# Altium PCB CL-HC-V2.1.PcbDoc (part 2 of 2)
Units mil, origin at the board's own origin, x right, y up, seen from the top; angles counter-clockwise.
Board outline 12846.15 x 9153.85 mil, 2 copper layers (TopLayer, BottomLayer); 137 components, 528 nets, 526 pads, 1 vias.
Unrouted connection lines stored in the file: 32.
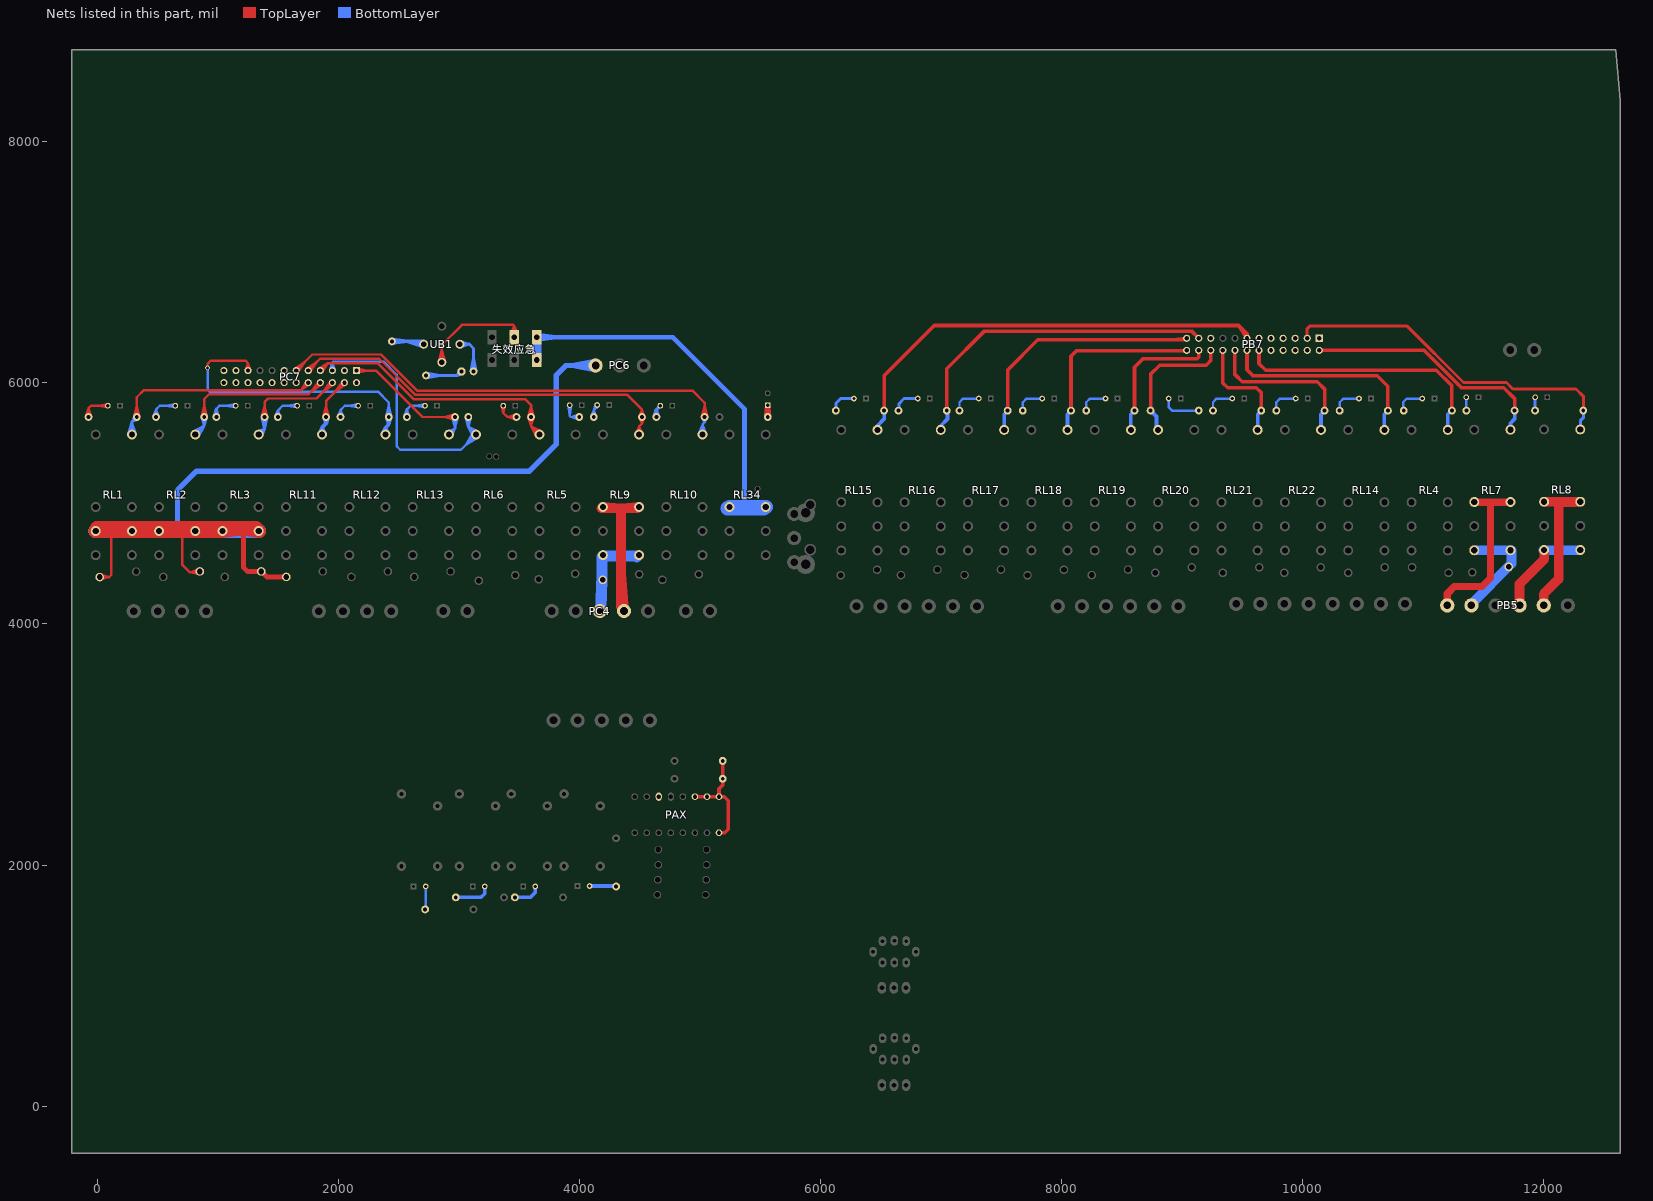
[diagram p2: the nets of this part, all layers, seen from the top]

## Via types
v1: diameter 40, hole 24, TopLayer to BottomLayer, tented both sides, 1 vias

## Nets (pads, with @x,y where several pads share a name; then routed paths per layer and width w, separated by ;. In a path a pad name is that pad's centre, name@x,y a point inside that pad or via, vN(x,y) a via of type N, cw(c..) or ccw(c..) an arc to the next point about the centre after c; other vN are vias at no path point) (continued)
L预热: PC6.1 RL1.4 RL2.4 RL3.4 RN15.1 RN18.1 RN19.1 RN20.1 | length 15496.7
  TopLayer w20: RL1.4@-10.82,4781.78 91.52,4777.46 ; RL1.4@-10.67,4770.44 91.52,4777.46 ; RL1.4@-9.27,4759.19 91.52,4777.46 ; RL1.4@-8.01,4801.67 91.52,4777.46 ; RL1.4@-3.76,4739.87 91.52,4777.46 ; RL1.4@18.6,4777.46 109.58,4777.46 117.92,4769.12 117.92,4406.11 100.71,4388.91 ; RN18.1@21.95,4388.91 100.71,4388.91 ; RN18.1@26.06,4363.81 100.71,4388.91 ; RN18.1@26.06,4414.01 100.71,4388.91 ; RL2.4@807.45,4800.81 713.62,4760.67 ; RL2.4@813.38,4739.16 713.62,4760.67 ; RL2.4@813.5,4781.65 713.62,4760.67 ; RL2.4@815.21,4770.44 713.62,4760.67 ; RL2.4@815.66,4759.11 713.62,4760.67 ; RN19.1@846.19,4459.77 771.98,4426.36 ; RL2.4@846.45,4760.67 708.47,4760.67 708.47,4489.87 771.98,4426.36 ; RN19.1@851.67,4409.82 771.98,4426.36 ; RN19.1@852.21,4426.36 771.98,4426.36 ; RN19.1@852.88,4435.23 771.98,4426.36
  TopLayer w39.37: 1215.91,4793.35 1215.91,4465.77 1246.46,4435.23 RN20.1@1362.88,4435.23 1408.55,4389.56 RN15.1@1570.52,4389.56
  TopLayer w118.11: 114.48,4793.35 RL2.4@515.21,4770.44 ; 391.97,4793.35 RL1.4@-10.67,4770.44 RL1.4@289.33,4770.44 ; 639.92,4793.35 RL3.4@1041.08,4770.44 ; 915.95,4793.35 RL2.4@515.21,4770.44 ; RL1.4@289.33,4770.44 RL2.4@515.21,4770.44 ; RL1.4@289.33,4770.44 -0.59,4793.35 RL3.4@1041.08,4793.35 ; RL1.4@289.33,4770.44 690.33,4793.35 RL2.4@515.21,4770.44 ; RL2.4@515.21,4770.44 414.17,4793.35 RL2.4@815.21,4770.44 ; RL2.4@515.21,4770.44 RL2.4@815.21,4770.44 ; RL2.4@815.21,4770.44 RL3.4@1041.08,4770.44 ; RL2.4@815.21,4770.44 RL3.4@1041.08,4793.35 ; RL3.4@1041.08,4770.44 1215.91,4793.35 ; RL3.4@1041.08,4793.35 1215.91,4793.35 ; 1215.91,4793.35 RL3.4@1341.08,4770.44 1318.18,4793.35 1215.91,4793.35
  BottomLayer w45: 667.72,4786.46 667.72,5109.29 825.2,5266.77 3586.02,5266.77 3810.43,5491.18 3810.43,6064.96 3889.17,6143.7 PC6.1@4135.83,6143.7 ; PC6.1@4132.38,6107.31 3941.77,6143.7 PC6.1@4132.38,6180.09
  BottomLayer w118.11: RL1.4@-10.67,4770.44 RL1.4@289.33,4770.44 RL2.4@515.21,4770.44 RL2.4@815.21,4770.44 RL3.4@1041.08,4770.44 RL3.4@1341.08,4770.44
NetC1_1: 
NetC14_1: 
NetC43_2: 
NetC44_2: 
NetD1_A: 
NetD6_A: 
NetD7_A: 
NetD8_A: 
NetD9_A: 
NetD10_A: 
NetD11_A: 
NetD12_A: 
NetD13_A: 
NetD14_A: 
NetD15_A: 
NetD15_K: D15.K R215.1 | length 221.6
  BottomLayer w30: D15.K@4085.83,1826.11 4301.94,1826.11 R215.1@4305.83,1822.22
NetD16_A: 
NetD16_K: D16.K R216.1 | length 236.6
  BottomLayer w30: R216.1@3465.83,1732.22 3595.83,1732.22 3635.83,1772.22 D16.K@3635.83,1822.22
NetD17_A: 
NetD17_K: D17.K R217.1 | length 312.9
  BottomLayer w30: R217.1@2975.83,1732.22 3185.83,1732.22 3215.83,1762.22 D17.K@3215.83,1822.74
NetD18_A: 
NetD18_K: D18.K R218.1 | length 192.2
  BottomLayer w20: R218.1@2721.82,1632.22 2725.83,1636.24 D18.K@2725.83,1822.74
NetD19_A: 
NetD20_A: 
NetD21_A: 
NetD22_A: 
NetD23_A: 
NetD24_A: 
NetD25_A: 
NetD26_A: 
NetD27_A: 
NetD28_A: 
NetD29_A: 
NetD30_A: 
NetD31_A: 
NetD32_A: 
NetD33_A: 
NetD34_A: 
NetD35_K: 
NetD36_K: 
NetD37_K: D37.K R147.1 | length 332.8
  BottomLayer w20: D37.K@8888.5,5869.33 8888.5,5799.33 8918.14,5769.7 R147.1@9139.03,5769.7
NetD38_K: D38.K R148.1 | length 242.4
  BottomLayer w20: R148.1@8205.4,5769.33 8205.4,5839.33 8235.4,5869.33 D38.K@8365.4,5869.33
NetD39_K: D39.K R149.1 | length 242.4
  BottomLayer w20: R149.1@7679.77,5769.33 7679.77,5839.33 7709.77,5869.33 D39.K@7839.77,5869.33
NetD40_K: D40.K R150.1 | length 242.4
  BottomLayer w20: R150.1@7154.14,5769.33 7154.14,5839.33 7184.14,5869.33 D40.K@7314.14,5869.33
NetD41_K: D41.K R151.1 | length 226.6
  BottomLayer w25: R151.1@6654.14,5769.33 6654.14,5829.33 6694.14,5869.33 D41.K@6804.14,5869.33
NetD42_K: D42.K R152.1 | length 226.6
  BottomLayer w25: R152.1@6128.5,5769.33 6128.5,5829.33 6168.5,5869.33 D42.K@6278.5,5869.33
NetD43_K: D43.K R153.1 | length 109.6
  BottomLayer w25: R153.1@11928.5,5769.7 D43.K@11928.5,5879.33
NetD44_K: D44.K R154.1 | length 110
  BottomLayer w20: R154.1@11358.5,5769.33 D44.K@11358.5,5879.33
NetD45_K: D45.K R155.1 | length 242.4
  BottomLayer w20: R155.1@10307.93,5769.33 10307.93,5839.33 10337.93,5869.33 D45.K@10467.93,5869.33
NetD46_K: D46.K R156.1 | length 242.4
  BottomLayer w20: R156.1@9256.67,5769.33 9256.67,5839.33 9286.67,5869.33 D46.K@9416.67,5869.33
NetD47_K: D47.K R157.1 | length 242.4
  BottomLayer w20: R157.1@9782.3,5769.33 9782.3,5839.33 9812.3,5869.33 D47.K@9942.3,5869.33
NetD48_K: D48.K R158.1 | length 242.4
  BottomLayer w20: R158.1@10833.56,5769.33 10833.56,5839.33 10863.56,5869.33 D48.K@10993.56,5869.33
NetD49_K: D49.K R159.1 | length 229.8
  BottomLayer w30: R159.1@4622.54,5718.81 4639.86,5777.66 ; R159.1@4639.86,5716.31 4639.86,5777.66 ; R159.1@4657.18,5718.81 4639.86,5777.66 ; D49.K@4672.2,5810 4639.86,5777.66
NetD50_K: D50.K R160.1 | length 543.4
  BottomLayer w20: R160.1@967.66,5720 989.86,5784.86 ; R160.1@989.86,5716.31 989.86,5784.86 ; R160.1@1012.05,5720 989.86,5784.86 ; D50.K@1148.89,5796.42 1066.38,5810 D50.K@1148.89,5823.58 ; D50.K@1150,5810 1015,5810 989.86,5784.86
NetD51_K: D51.K R161.1 | length 530.5
  BottomLayer w20: R161.1@467.72,5720.3 489.86,5779.86 ; R161.1@489.86,5716.31 489.86,5779.86 ; R161.1@512,5720.3 489.86,5779.86 ; D51.K@648.89,5796.42 566.38,5810 D51.K@648.89,5823.58 ; D51.K@650,5810 520,5810 489.86,5779.86
NetD52_K: D52.K R162.1 | length 556.4
  TopLayer w20: R162.1@-92.38,5719.75 -70.14,5789.86 ; R162.1@-70.14,5716.31 -70.14,5789.86 ; R162.1@-47.91,5719.75 -70.14,5789.86 ; D52.K@88.89,5796.42 6.38,5810 D52.K@88.89,5823.58 ; D52.K@90,5810 -50,5810 -70.14,5789.86
NetD53_K: D53.K R163.1 | length 520.5
  BottomLayer w20: R163.1@2547.72,5720.3 2569.86,5779.86 ; R163.1@2569.86,5716.31 2569.86,5779.86 ; R163.1@2592,5720.3 2569.86,5779.86 ; D53.K@2718.89,5796.42 2636.38,5810 D53.K@2718.89,5823.58 ; D53.K@2720,5810 2600,5810 2569.86,5779.86
NetD54_K: D54.K R164.1 | length 503.2
  BottomLayer w20: R164.1@1997.78,5720.64 2019.86,5774.86 ; R164.1@2019.86,5716.31 2019.86,5774.86 ; R164.1@2041.94,5720.64 2019.86,5774.86 ; D54.K@2164.53,5796.42 2082.02,5810 D54.K@2164.53,5823.58 ; D54.K@2165.64,5810 2055,5810 2019.86,5774.86
NetD55_K: D55.K R165.1 | length 504.7
  BottomLayer w20: R165.1@1477.86,5721.04 1499.86,5769.86 ; R165.1@1499.86,5716.31 1499.86,5769.86 ; R165.1@1521.86,5721.04 1499.86,5769.86 ; D55.K@1658.89,5796.42 1576.38,5810 D55.K@1658.89,5823.58 ; D55.K@1660,5810 1540,5810 1499.86,5769.86
NetD56_K: 
NetD57_K: 
NetD58_K: 
NetD59_K: 
NetD60_K: 
NetD61_K: D61.K R171.1 | length 452.9
  TopLayer w20: D61.K@3356.47,5808.43 3370,5750.8 ; D61.K@3370,5810 3370,5750.8 ; D61.K@3383.53,5808.43 3370,5750.8 ; R171.1@3476.65,5694.06 3404.49,5716.31 ; R171.1@3476.65,5738.56 3404.49,5716.31 ; R171.1@3480,5716.31 3404.49,5716.31 ; 3370,5750.8 3404.49,5716.31
NetD62_K: 
NetD63_K: 
NetD64_K: 
NetD65_K: D65.K R175.1 | length 480.3
  BottomLayer w20: D65.K@3906.42,5813.89 3920,5731.38 D65.K@3933.58,5813.89 ; D65.K@3920,5815 3920,5726.63 3930.32,5716.31 ; R175.1@3996.74,5694.1 3930.32,5716.31 ; R175.1@3996.74,5738.52 3930.32,5716.31 ; R175.1@4000.36,5716.31 3930.32,5716.31
NetD66_K: 
NetD67_K: D67.K R177.1 | length 381.9
  BottomLayer w20: R177.1@4097.98,5720.94 4120,5771.04 ; R177.1@4120,5716.31 4120,5771.04 ; D67.K@4137,5821.85 4120,5771.04 ; R177.1@4142.02,5720.94 4120,5771.04 ; D67.K@4159.64,5807.09 4120,5771.04 ; 4120,5771.04 D67.K@4149.27,5815.92 4149.27,5800.31 4120,5771.04
NetD71_A: 
NetD72_K: 
NetD73_K: 
NetD74_A: 
NetD74_K: 
NetD75_A: 
NetD75_K: 
NetD76_K: 
NetD77_K: 
NetD78_K: 
NetD79_K: 
NetD80_K: 
NetD81_K: 
NetD82_K: 
NetD83_K: 
NetD84_K: 
NetD85_K: 
NetD86_K: 
NetD87_K: 
NetD88_K: 
NetD89_K: 
NetD90_K: 
NetD91_K: 
NetD92_K: 
NetD93_K: 
NetD94_K: 
NetD95_A: 
NetD96_A: 
NetD97_A: 
NetD98_A: 
NetD99_A: 
NetD100_A: 
NetD101_A: 
NetD102_A: 
NetD103_A: 
NetD104_A: 
NetD105_A: 
NetD106_A: 
NetD106_K: 
NetD107_A: 
NetD107_K: 
NetD108_A: 
NetD108_K: 
NetD109_A: 
NetD110_A: D110.A R292.2 | length 1382.2
  TopLayer w20: R292.2@5541.05,5719.05 D110.A@5563.38,5808.81 ; D110.A@5549.91,5815.48 R292.2@5544.12,5731.39 ; D110.A@5550.41,5809.28 R292.2@5582.65,5731.39 ; D110.A@5576.34,5809.28 R292.2@5544.12,5731.39 ; D110.A@5576.85,5815.49 R292.2@5582.65,5731.39 ; R292.2@5585.72,5719.05 D110.A@5563.38,5808.81 ; R292.2@5544.12,5731.39 D110.A@5563.38,5813.45 ; R292.2@5563.38,5729.83 D110.A@5563.38,5813.45 ; R292.2@5563.38,5729.83 5549.8,5812.34 R292.2@5563.38,5729.83 ; R292.2@5563.38,5729.83 5576.95,5812.35 R292.2@5563.38,5729.83 ; R292.2@5563.38,5729.83 D110.A@5563.38,5813.45 ; D110.A@5563.38,5808.81 R292.2@5563.39,5716.31 D110.A@5563.38,5813.45 ; D110.A@5563.38,5813.45 R292.2@5582.65,5731.39
NetD199_A: 
NetDZ1_K: 
NetF1_1: 
NetF2_1: 
NetF3_1: 
NetF4_1: 
NetF5_1: 
NetF6_1: 
NetF9_2: 
NetQ1_1: 
NetQ1_2: 
NetQ2_2: 
NetQ3_2: 
NetQ4_1: 
NetQ4_2: 
NetQ5_1: 
NetQ5_2: 
NetQ6_2: 
NetQ7_1: 
NetQ7_2: 
NetQ8_2: 
NetQ9_1: 
NetQ9_2: 
NetQ10_2: 
NetQ11_2: 
NetQ12_2: 
NetQ13_1: 
NetQ13_2: 
NetQ13_3: 
NetQ14_1: 
NetQ15_2: 
NetQ15_3: 
NetQ16_2: 
NetQ17_2: 
NetQ18_1: 
NetQ18_2: 
NetQ18_3: 
NetQ19_1: 
NetQ19_2: 
NetQ20_2: 
NetQ21_2: 
NetQ22_2: 
NetQ23_2: 
NetQ24_2: 
NetQ25_2: 
NetR15_2: 
NetR16_2: 
NetR17_2: 
NetR18_2: 
NetR19_2: 
NetR20_2: 
NetR21_2: 
NetR22_2: 
NetR23_2: 
NetR24_2: 
NetR25_2: 
NetR26_2: 
NetR27_2: 
NetR28_2: 
NetR29_2: 
NetR30_2: 
NetR31_2: 
NetR32_2: 
NetR33_2: 
NetR34_2: 
NetR36_1: 
NetR68_2: 
NetR69_2: 
NetR70_2: 
NetR71_2: 
NetR88_1: 
NetR89_1: 
NetR91_2: 
NetR92_1: 
NetR93_2: 
NetR94_2: 
NetR95_2: 
NetR96_2: 
NetR97_2: 
NetR98_2: 
NetR178_2: 
NetR179_1: LX1.A R179.1 | length 645.8
  BottomLayer w25: R179.1@2728.96,6061.2 2989.98,6061.2 ; R179.1@2730.61,6041.26 2849.92,6061.2 R179.1@2730.61,6081.13 ; LX1.A@3006.86,6105.73 2989.98,6061.2 ; LX1.A@3023.66,6094.87 2989.98,6061.2 ; LX1.A@3034.51,6078.08 2989.98,6061.2
NetR179_2: R179.2 UB1.3 | length 968
  BottomLayer w30: R179.2@2446.11,6344.04 2685.96,6344.04 UB1.3@2710,6320 2571.33,6344.04 ; R179.2@2447.24,6326.58 2582.08,6344.04 R179.2@2447.24,6361.5 ; UB1.3@2704.4,6298.21 2571.33,6344.04 ; UB1.3@2712.06,6342.41 2571.33,6344.04
NetR192_1: 
NetR196_2: 
NetR197_1: 
NetR199_1: 
NetR200_2: 
NetR201_2: 
NetR204_1: 
NetR209_1: 
NetR211_2: 
NetR212_1: 
NetR213_2: 
NetR293_1: 
NetR294_1: 
NetRL34_5: RL34.5 失效应急.3 失效应急.6 | length 4928.1
  BottomLayer w39.37: 失效应急.6@3646.47,6378.69 4776.91,6378.69 5370,5785.6 5370,5019.25 ; 失效应急.6@3647.7,6359.04 3803.95,6378.69 失效应急.6@3647.7,6398.34
  BottomLayer w80: 失效应急.3@3646.47,6189.71 3646.47,6359.01 3646.47,6209.4 失效应急.6@3646.47,6378.69 失效应急.3@3646.47,6189.71
  BottomLayer w118.11: RL34.5@5230.51,4959.25 RL34.5@5546.7,4970.44 RL34.5@5246.7,4970.44 5530.51,4959.25 RL34.5@5230.51,4959.25
NetU1X_2: UB1.2 失效应急.5 | length 1322.6
  TopLayer w20: UB1.2@2832.77,6173.88 2860,6267.5 UB1.2@2887.23,6173.88 ; UB1.2@2860,6170 2860,6313.08 3026.92,6480 3452.45,6480 3461.43,6471.03 ; 失效应急.5@3432.67,6404.31 3461.43,6471.03 ; 失效应急.5@3461.43,6378.69 3461.43,6471.03 ; 失效应急.5@3461.43,6398.38 3461.43,6471.03 ; 失效应急.5@3490.19,6404.31 3461.43,6471.03
NetU1X_4: LX1.K UB1.4 | length 691.4
  BottomLayer w25: UB1.4@3010,6320 3088.97,6320 ; UB1.4@3013.96,6295.32 3088.97,6320 ; UB1.4@3013.96,6344.68 3088.97,6320 ; LX1.K@3103.74,6096.73 3123.66,6202.37 LX1.K@3143.57,6096.73 ; LX1.K@3123.66,6094.87 3123.66,6285.31 3088.97,6320
NetU42_2: 
NetU55_2: 
OSC1: 
OSC2: 
OSC3: 
OSC4: 
OUT1: 
OUT2: 
OUT3: 
OUT4: 
OUT5: 
OUT6: 
OUT7: 
OUT8: 
OUT9: 
OUT10: 
OUT11: 
OUT12: 
OUT13: 
OUT14: 
OUT15: 
OUT15X: 
OUT16: 
OUT17: 
OUT18: 
OUT19: 
OUT20: 
OUT21: 
OUT22: 
OUT23: 
OUT24: 
OUT25: 
OUT26: 
OUT27: 
OUT28: 
OUT29: 
OUT30: 
OUT31: 
OUT32: 
PLD_165: 
POL_A2: 
POL_B2: 
RESET1: 
RESET2: 
ROUT1: PB7.2 PC7.2 R154.2 RL7.2 | length 2072.4
  TopLayer w30: PB7.2@10138.5,6269.33 11007.73,6269.33 11317.73,5959.33 11668.5,5959.33 11758.5,5869.33 R154.2@11758.5,5769.33 ; RL7.2@11733.39,5609.8 RL7.2@11743.3,5619.7
  BottomLayer w30: RL7.2@11724.12,5610.92 11724.12,5664.94 11758.5,5699.33 R154.2@11758.5,5769.33
ROUT2: PB7.4 PC7.1 R163.2 RL13.2 | length 1982.6
  TopLayer w20: PC7.1@2152.35,6101.59 2315.43,6101.59 2700.7,5716.31 R163.2@2969.86,5716.31 ; PC7.1@2154.48,6082.17 2241.87,6101.59 PC7.1@2154.48,6121 ; R163.2@2967.12,5693.98 2877.36,5716.31 R163.2@2967.12,5738.64
  BottomLayer w20: RL13.2@2901.87,5596.88 2969.86,5621.6 ; RL13.2@2911.34,5579.06 2969.86,5621.6 ; RL13.2@2918.7,5570.44 2969.86,5621.6 ; RL13.2@2927.32,5563.08 2969.86,5621.6 ; RL13.2@2945.14,5553.61 2969.86,5621.6 ; R163.2@2947.53,5713.58 2969.86,5623.81 R163.2@2992.19,5713.58 ; R163.2@2969.86,5716.31 2969.86,5621.6
ROUT3: PB7.6 PC7.6 R160.2 RL3.2 | length 1741.7
  TopLayer w20: R160.2@1367.53,5719.05 1389.86,5808.81 R160.2@1412.19,5719.05 ; R160.2@1389.86,5716.31 1389.86,5840.16 1419.7,5870 1820.76,5870 PC7.6@1952.35,6001.59 1880.39,5929.63 ; PC7.6@1937.28,6014 1880.39,5929.63 ; PC7.6@1964.77,5986.52 1880.39,5929.63
  BottomLayer w25: RL3.2@1325.4,5594.65 1389.86,5619.22 ; RL3.2@1341.08,5570.44 1389.86,5619.22 ; RL3.2@1365.28,5554.76 1389.86,5619.22 ; R160.2@1369.97,5714.25 1389.86,5619.22 ; R160.2@1389.86,5716.31 1389.86,5619.22 ; R160.2@1409.75,5714.25 1389.86,5619.22
ROUT4: PB7.8 PC7.8 R161.2 RL2.2 | length 2399.5
  TopLayer w20: R161.2@867.53,5719.05 889.86,5808.81 R161.2@912.19,5719.05 ; R161.2@889.86,5716.31 889.86,5864.86 930,5905 1755.76,5905 PC7.8@1852.35,6001.59 1780.39,5929.63 ; PC7.8@1837.28,6014 1780.39,5929.63 ; PC7.8@1864.77,5986.52 1780.39,5929.63
  BottomLayer w20: RL2.2@796.58,5595.65 889.86,5645.1 ; RL2.2@807.63,5578.88 889.86,5645.1 ; RL2.2@815.21,5570.44 889.86,5645.1 ; RL2.2@823.64,5562.87 889.86,5645.1 ; RL2.2@840.41,5551.82 889.86,5645.1 ; R161.2@867.64,5712.76 889.86,5645.1 ; R161.2@889.86,5716.31 889.86,5645.1 ; R161.2@912.08,5712.76 889.86,5645.1
ROUT5: PB7.10 PC7.10 R162.2 RL1.2 | length 2765.4
  TopLayer w20: R162.2@307.53,5719.05 329.86,5808.81 R162.2@352.19,5719.05 ; R162.2@329.86,5716.31 329.86,5879.86 390,5940 1690.76,5940 ; PC7.10@1737.08,6013.76 1690.76,5940 ; PC7.10@1764.52,5986.32 1690.76,5940 ; 1690.76,5940 PC7.10@1752.35,6001.59 1690.76,5940
  BottomLayer w20: RL1.2@258.37,5575.29 289.33,5671.78 ; RL1.2@278.01,5571.08 289.33,5671.78 ; RL1.2@289.33,5570.44 289.33,5675.78 ; RL1.2@300.65,5571.08 289.33,5671.78 ; R162.2@311.14,5728.79 289.33,5675.78 ; RL1.2@320.29,5575.29 289.33,5671.78 ; R162.2@329.86,5716.31 289.33,5675.78 ; R162.2@342.34,5697.59 289.33,5675.78
ROUT6: PB7.12 PC7.12 R158.2 RL4.2 | length 2163.7
  TopLayer w30: PB7.12@9638.5,6269.33 9638.5,6159.33 9693.5,6104.33 11109.09,6104.33 11238.5,5974.92 R158.2@11238.5,5769.33
  BottomLayer w30: RL4.2@11204.09,5609.8 11204.09,5739.86 R158.2@11233.56,5769.33
ROUT7: PB7.14 PC7.14 R155.2 RL14.2 | length 1766.9
  TopLayer w30: PB7.14@9538.5,6269.33 9538.5,6109.33 9588.5,6059.33 10618.5,6059.33 10707.41,5970.43 R155.2@10707.41,5768.96
  BottomLayer w30: RL14.2@10678.46,5609.8 10678.46,5739.86 R155.2@10707.93,5769.33 ; RL14.2@10681.11,5602.53 RL14.2@10681.11,5609.8
ROUT8: PB7.16 PC7.16 R157.2 RL22.2 | length 1345.1
  TopLayer w30: PB7.16@9438.5,6269.33 9438.5,6069.33 9498.5,6009.33 10122.11,6009.33 10182.3,5949.14 R157.2@10182.3,5769.33
  BottomLayer w30: RL22.2@10152.83,5609.8 10152.83,5739.86 R157.2@10182.3,5769.33
ROUT9: PB7.18 PC7.18 R156.2 RL21.2 | length 943
  TopLayer w30: PB7.18@9338.5,6269.33 9338.5,5999.33 9378.5,5959.33 9616.67,5959.33 9656.67,5919.33 R156.2@9656.67,5769.33
  BottomLayer w30: RL21.2@9627.2,5609.8 9627.2,5739.86 R156.2@9656.67,5769.33
ROUT10: PB7.20 PC7.20 R147.2 RL20.1 | length 1117.3
  TopLayer w30: R147.2@8739.03,5769.7 8739.03,6069.86 8815.9,6146.72 9199.88,6146.72 9238.5,6185.35 PB7.20@9238.5,6269.33
  BottomLayer w30: R147.2@8739.03,5769.7 8788.5,5720.22 8788.5,5622.86 RL20.1@8801.56,5609.8
ROUT11: PB7.22 PC7.22 R148.2 RL19.2 | length 1156.7
  TopLayer w30: R148.2@8605.4,5769.33 8605.4,6129.33 8676.35,6200.28 9127.29,6200.28 9138.5,6211.49 PB7.22@9138.5,6269.33
  BottomLayer w30: RL19.2@8575.93,5609.8 8575.93,5739.86 R148.2@8605.4,5769.33
ROUT12: PB7.24 PC7.24 R149.2 RL18.2 | length 1723
  TopLayer w30: R149.2@8079.24,5768.96 8079.24,6220.07 8123.71,6264.54 9033.71,6264.54 PB7.24@9038.5,6269.33 8918.08,6264.54
  BottomLayer w30: RL18.2@8050.3,5609.8 8050.3,5739.86 R149.2@8079.77,5769.33
ROUT13: PB7.23 PC7.23 R150.2 RL17.2 | length 2227.1
  TopLayer w30: R150.2@7553.61,5768.96 7553.61,6107.11 7802.67,6356.17 9025.34,6356.17 PB7.23@9038.5,6369.33 8915.46,6356.17
  BottomLayer w30: RL17.2@7524.67,5609.8 7524.67,5739.86 R150.2@7554.14,5769.33
ROUT14: PB7.21 PC7.21 R151.2 RL16.2 | length 2774.1
  TopLayer w30: R151.2@7048.5,5768.96 7048.5,6116.1 7361.74,6429.33 9078.5,6429.33 PB7.21@9138.5,6369.33
  BottomLayer w30: RL16.2@6999.03,5609.8 6999.03,5644.23 7054.14,5699.33 R151.2@7054.14,5769.33
ROUT15: 
ROUT15X: 
ROUT16: 
ROUT17: 
ROUT18: 
ROUT19: 
ROUT20: 
ROUT21: 
ROUT22: PB7.13 PC7.13 R152.2 RL15.2 | length 3882.8
  TopLayer w30: R152.2@6528.5,5769.33 6528.5,6057.97 6945.7,6475.17 9469.9,6475.17 ; 9469.9,6475.17 9538.5,6406.56 ; 9469.9,6475.17 PB7.13@9538.5,6369.33 ; PB7.13@9538.5,6369.33 9538.5,6406.56 ; PB7.13@9538.5,6369.33 9538.5,6406.56
  BottomLayer w30: RL15.2@6473.4,5609.8 6473.4,5644.23 6528.5,5699.33 R152.2@6528.5,5769.33
ROUT23: PB7.11 PC7.11 R159.2 RL10.2 | length 4796.2
  TopLayer w20: PC7.11@1639.93,6116.65 1724.3,6173.54 ; PC7.11@1667.41,6089.17 1724.3,6173.54 ; R159.2@5017.53,5719.05 5039.86,5808.81 R159.2@5062.19,5719.05 ; R159.2@5039.86,5716.31 5039.86,5835.14 4940,5935 2655.5,5935 2355.5,6235 1785.76,6235 PC7.11@1652.35,6101.59 1724.3,6173.54
  BottomLayer w20: RL10.2@4991.4,5576.25 5022.2,5655 ; RL10.2@5010.89,5571.2 5022.2,5655 ; R159.2@5018.12,5710.51 5039.86,5672.66 ; RL10.2@5022.2,5570.44 5022.2,5655 ; RL10.2@5033.51,5571.2 5022.2,5655 ; R159.2@5039.86,5716.31 5039.86,5672.66 ; RL10.2@5052.99,5576.25 5022.2,5655 ; R159.2@5061.6,5710.51 5039.86,5672.66 ; 5022.2,5655 5039.86,5672.66
ROUT24: PB7.9 PC7.9 R177.2 RL9.2 | length 4011.6
  TopLayer w20: PC7.9@1739.93,6116.65 1824.3,6173.54 ; PC7.9@1767.41,6089.17 1824.3,6173.54 ; RL9.2@4465.87,5577.84 4496.32,5636.86 ; RL9.2@4485.03,5571.41 4496.32,5636.86 ; RL9.2@4496.32,5570.44 4496.32,5636.86 ; R177.2@4497.85,5720.29 4520,5780 ; R177.2@4497.96,5711.77 4520,5660.54 ; RL9.2@4507.62,5571.41 4496.32,5636.86 ; RL9.2@4526.78,5577.84 4496.32,5636.86 ; R177.2@4542.04,5711.77 4520,5660.54 ; R177.2@4542.15,5720.29 4520,5780 ; 1824.3,6173.54 PC7.9@1752.35,6101.59 1850.76,6200 2341.01,6200 2641.01,5900 4400,5900 4520,5780 ; 4496.32,5636.86 4520,5660.54 ; 4520,5660.54 R177.2@4520,5716.31 4520,5780
ROUT25: PB7.7 PC7.7 R175.2 RL5.1 | length 3187.5
  TopLayer w20: PC7.7@1840.16,6116.84 1914.34,6163.58 ; PC7.7@1867.61,6089.4 1914.34,6163.58 ; R175.2@3578.02,5719.05 3600.36,5808.81 R175.2@3622.69,5719.05 ; R175.2@3578.11,5712.97 3600.36,5640.54 ; R175.2@3622.61,5712.97 3600.36,5640.54 ; RL5.1@3645.07,5552.06 3600.36,5640.54 ; RL5.1@3661.99,5562.9 3600.36,5640.54 ; RL5.1@3670.45,5570.44 3600.36,5640.54 ; RL5.1@3678,5578.9 3600.36,5640.54 ; RL5.1@3688.83,5595.83 3600.36,5640.54 ; 1914.34,6163.58 PC7.7@1852.35,6101.59 1914.34,6163.58 ; 1914.34,6163.58 2327.93,6163.58 2626.51,5865 3550,5865 3600.36,5814.64 R175.2@3600.36,5716.31 3600.36,5640.54
ROUT26: PB7.5 PC7.5 R171.2 RL6.1 | length 3335.3
  BottomLayer w20: PC7.5@1933.03,6104.48 1952.35,6167.35 ; PC7.5@1971.66,6104.48 1952.35,6167.35 ; R171.2@3057.72,5713.2 3080,5635.02 ; R171.2@3080,5716.31 3080,5635.02 ; R171.2@3102.28,5713.2 3080,5635.02 ; RL6.1@3118.94,5552.41 3080,5635.02 ; RL6.1@3119.68,5589.48 3060.81,5486.68 ; RL6.1@3136.08,5562.94 3080,5635.02 ; RL6.1@3136.18,5578.07 3060.81,5486.68 ; RL6.1@3152.08,5578.94 3080,5635.02 ; RL6.1@3152.2,5562.05 3060.81,5486.68 ; RL6.1@3162.61,5596.08 3080,5635.02 ; RL6.1@3163.61,5545.55 3060.81,5486.68 ; 1952.35,6167.35 PC7.5@1952.35,6101.59 1952.35,6167.35 ; 1952.35,6167.35 1961.31,6176.31 2376.19,6176.31 2485,6067.51 2485,5475 2515,5445 3019.13,5445 RL6.1@3144.58,5570.44 3080,5635.02
ROUT27: PB7.3 PC7.3 R153.2 RL8.2 | length 2904.7
  TopLayer w25: PB7.3@10038.5,6369.33 10038.5,6449.33 10058.5,6469.33 10867.84,6469.33 11335.34,6001.83 11690.8,6001.83 11743.3,5949.33 12268.5,5949.33 12328.5,5889.33 R153.2@12328.5,5769.7
  BottomLayer w25: RL8.2@12303.49,5613.54 12303.49,5684.32 12328.5,5709.33 R153.2@12328.5,5769.7
ROUT28: PB7.1 PC7.4 R165.2 RL11.2 | length 1224.1
  TopLayer w20: R165.2@1877.53,5719.05 1899.86,5808.81 R165.2@1922.19,5719.05 ; R165.2@1899.86,5716.31 1899.86,5849.1 PC7.4@2052.35,6001.59 1980.39,5929.63 ; PC7.4@2037.28,6014 1980.39,5929.63 ; PC7.4@2064.77,5986.52 1980.39,5929.63
  BottomLayer w30: RL11.2@1841.28,5576.33 1866.95,5629.31 ; RL11.2@1866.95,5570.44 1866.95,5629.31 ; R165.2@1882.59,5713.48 1899.86,5662.22 ; RL11.2@1892.63,5576.33 1866.95,5629.31 ; R165.2@1899.86,5716.31 1899.86,5662.22 ; R165.2@1917.13,5713.48 1899.86,5662.22 ; 1866.95,5629.31 1899.86,5662.22
ROUT29: PB7.19 PC7.19 R164.2 RL12.2 | length 3089.5
  TopLayer w20: v1(916.59,6124.35) 916.59,6156.37 944.01,6183.8 1231.09,6183.8 1252.35,6162.54 ; PC7.19@1233.07,6104.71 1252.35,6162.54 ; PC7.19@1252.35,6101.59 1252.35,6162.54 ; PC7.19@1271.62,6104.71 1252.35,6162.54
  BottomLayer w20: 919.2,6044.24 v1(916.59,6124.35) 916.59,6126.74 919.2,6129.35 919.2,5940.8 933.41,5926.59 2168.41,5926.59 2330.05,5926.59 2419.86,5836.77 R164.2@2419.86,5716.31 ; R164.2@2397.53,5719.05 2419.86,5808.81 R164.2@2442.19,5719.05
  BottomLayer w30: RL12.2@2367.19,5576.49 2392.83,5627.83 ; RL12.2@2392.83,5570.44 2392.83,5627.83 ; R164.2@2402.54,5713.82 2419.86,5654.86 ; RL12.2@2418.46,5576.49 2392.83,5627.83 ; R164.2@2419.86,5716.31 2419.86,5654.86 ; R164.2@2437.18,5713.82 2419.86,5654.86 ; 2392.83,5627.83 2419.86,5654.86
ROUT30: 
ROUT31: 
ROUT32: 
RX: 
RX2: 
RX3: 
SDO_165: 
TX: 
TX2: 
TX3: 
VCC: 
VPP1: 
VPP2: 
三角接法: PC4.2 RL9.5 | length 1761.8
  TopLayer w80: RL9.5@4184.87,4959.26 4346.39,4959.26 ; RL9.5@4196.32,4970.44 4346.39,4959.26 ; 4346.39,4415.78 PC4.2@4371.46,4106.99 ; PC4.2@4371.02,4118.31 4346.39,4142.94 4346.39,4959.26 ; RL9.5@4484.87,4959.26 4346.39,4959.26 ; RL9.5@4496.32,4970.44 4346.39,4959.26
中效: 
亚高效: 
冷/热水: 
冷水阀执行: 
初效: 
加湿器控制: 
变频值机: 
变频全速: 
变频开启: 
回风压差: 
回风温度: 
回风湿度: 
备用AO1: 
备用AO2: 
备用AO3: 
外急停开关: 
大地: PAX.5
定量关: PB5.5 RL8.5 | length 1505.5
  TopLayer w80: PB5.5@11999.38,4155.73 11999.38,4246.92 12123.48,4371.02 12123.48,5009.8 12259.02,5009.8 ; RL8.5@12003.49,5013.54 RL8.5@12303.49,5013.54 ; RL8.5@12004.71,5014.35 12169.16,5014.35
定量开: PB5.4 RL8.3 | length 842.4
  TopLayer w80: PB5.4@11799.38,4155.73 11799.38,4331.41 12003.49,4535.52 RL8.3@12003.49,4613.54
  BottomLayer w80: RL8.3@11998.16,4612.42 RL8.3@12298.16,4612.42
密闭关: PB5.1 RL7.5 | length 1437.3
  TopLayer w60: PB5.1@11199.38,4155.73 11199.38,4250.77 11258.32,4309.71 11488,4309.71 11558.45,4380.15 11558.45,5009.8 ; RL7.5@11433.39,5009.8 11558.45,5009.8 ; RL7.5@11733.39,5009.8 11558.45,5009.8
密闭开: PB5.2 RL7.3 RN11.2 | length 933.7
  BottomLayer w80: PB5.2@11399.38,4155.73 11399.38,4166.3 11733.39,4500.31 ; RL7.3@11433.39,4609.8 11733.39,4609.8 11733.39,4500.31 ; RN11.2@11704.2,4471.12 11733.39,4500.31
手动调速: 
星接法: PC4.3 RL9.3 RN23.2 | length 3085.4
  BottomLayer w80: PC4.3@4171.02,4118.31 PC4.3@4184.87,4132.16 ; 4184.87,4287.37 RL9.3@4196.32,4570.44 ; 4184.87,4408 PC4.3@4171.46,4106.99 RN23.2@4195.2,4365.47 ; RL9.3@4212.67,4569.79 RL9.3@4496.32,4570.44 RL9.3@4213.45,4559.26 ; RL9.3@4475.81,4550.2 4484.87,4559.26 RL9.3@4184.87,4559.26 ; RL9.3@4478.52,4559.26 RL9.3@4196.32,4570.44 ; PC4.3@4184.87,4132.16 RN23.2@4195.2,4365.47 ; PC4.3@4184.87,4132.16 RL9.3@4184.87,4559.26 ; RL9.3@4184.87,4559.26 RN23.2@4195.2,4365.47 ; RN23.2@4195.2,4365.47 RL9.3@4196.32,4570.44
消防: 
热水阀执行: 
电高温: 
硬接线-温度: PAX.11 PAX.13 PAX.15 PAX.16 R219.1 R220.1 | length 919.4
  TopLayer w30: PAX.11@4959.58,2567.3 PAX.13@5059.58,2567.3 PAX.15@5159.58,2567.3 5202.17,2567.3 5235.52,2533.96 5235.52,2295.95 5206.87,2267.3 PAX.16@5159.58,2267.3 ; PAX.15@5168.18,2575.89 5159.58,2584.49 5159.58,2633.96 5189.47,2663.85 R219.1@5189.47,2863.77
硬接线-湿度: 
管温: 
缺风: 
自动门开关1: 
自动门开关2: 
自动门开关3: 
自动门开关4: 
自动门开关5: 
自动门开关6: 
设定温度: 
设定湿度: 
负压: 
远值机: 
远启动: 
防冻: 
预热温感: 
预高温: 
频率控制: 
频率选择输出: 
高效: 
pads on no net: 1_1_1.+ 1_1_1.- 1_1_1.ON 1_3.+ 1_3.- 1_3.ON PB1'.2 RL1.5 RL2.5 RL3.5 RL4.5 RL5.5 RL6.5 RL10.5 RL11.5 RL12.5 RL13.5 RL14.5 RL15.5 RL16.5 RL17.5 RL18.5 RL19.5 RL20.5 RL21.5 RL22.5 RL34.3 SW1.0 SW1.1 SW1.2 SW1.3 SW1.4 SW1.5 SW1.6 SW1.7 SW2.0 SW2.1 SW2.2 SW2.3 SW2.4 SW2.5 SW2.6 SW2.7 失效应急.1 失效应急.4
copper on no net: | length 10981.6
  TopLayer w10: 6602.76,584.94 cw(c6679.92,589.66) 6675.2,666.82 cw(c6643.31,505.8) 6804.33,473.91 ; 6614.57,595.57 6614.57,629.66 ; 6622.76,586.67 6622.76,637.85 ; 6630.63,590.6 6630.63,641.79 ; 6784.17,500.05 6784.17,582.73 ; 6792.91,503.44 6792.91,570.05 ; 6799.92,496.12 6799.92,540.29
  BottomLayer w10: 6420.45,1249.09 cw(c6389.8,1218.43) 6433.15,1218.43 ; 6421.24,443.58 cw(c6391.53,413.87) 6433.54,413.87 ; 6433.15,1196 cw(c6508.23,1196) 6455.14,1249.09 ; 6433.15,1214.31 cw(c6474.96,1214.31) 6445.4,1243.87 ; 6433.15,1220.14 cw(c6484.08,1220.14) 6448.07,1256.16 ; 6433.15,1226.91 cw(c6474.96,1226.91) 6445.4,1256.47 ; 6433.15,1256.04 cw(c6474.96,1256.04) 6445.4,1285.6 ; 6433.54,389.54 cw(c6509.96,389.54) 6455.93,443.58 ; 6433.54,407.84 cw(c6476.7,407.84) 6446.18,438.36 ; 6433.54,413.68 cw(c6485.82,413.68) 6448.86,450.65 ; 6433.54,420.44 cw(c6476.7,420.44) 6446.18,450.96 ; 6433.54,449.58 cw(c6476.7,449.58) 6446.18,480.09 ; 6438.82,469.3 cw(c6438.94,474.7) 6433.54,474.7 ; 6439.3,1274.71 cw(c6440.29,1281.79) 6433.15,1281.79 ; 6444.14,1260.15 cw(c6459.95,1281.78) 6433.15,1281.78 ; 6444.35,455.03 cw(c6456.85,474.7) 6433.54,474.7 ; 6444.63,1028.89 ccw(c6485.69,1069.95) 6503.91,1014.81 ; 6445.02,221.8 ccw(c6486.09,262.87) 6504.3,207.72 ; 6456.1,1017.41 ccw(c6491.39,1052.7) 6507.04,1005.31 ; 6456.5,210.33 ccw(c6491.79,245.61) 6507.44,198.23 ; 6467.58,1005.94 ccw(c6497.09,1035.45) 6510.18,995.82 ; 6467.97,198.85 ccw(c6497.48,228.36) 6510.57,188.73 ; 6497.24,976.27 6433.15,1040.37 ; 6497.64,169.19 6433.54,233.28 ; 6500.77,1024.31 cw(c6479.99,1087.21) 6433.15,1040.37 ; 6501.16,217.22 cw(c6480.39,280.12) 6433.55,233.28 ; 6588.8,1016.93 ccw(c6524.68,1081.05) 6615.35,1081.05 ; 6595.04,1161.08 cw(c6546.01,1112.05) 6615.35,1112.05 ; 6595.04,1222.17 ccw(c6546.01,1271.21) 6615.35,1271.21 ; 6595.04,1336.28 cw(c6546.01,1287.25) 6615.35,1287.25 ; 6595.87,1009.86 ccw(c6548.82,1056.9) 6615.35,1056.9 ; 6602.12,1168.15 cw(c6570.15,1136.19) 6615.35,1136.19 ; 6602.12,1215.1 ccw(c6570.15,1247.07) 6615.35,1247.07 ; 6602.12,1343.35 cw(c6570.15,1311.39) 6615.35,1311.39 ; 6602.94,1002.79 ccw(c6572.96,1032.76) 6615.35,1032.76 ; 6606.18,1155.29 cw(c6584.03,1133.14) 6615.35,1133.14 ; 6606.18,1167.89 cw(c6584.03,1145.74) 6615.35,1145.74 ; 6606.18,1170.49 ccw(c6584.03,1192.64) 6615.35,1192.64 ; 6606.18,1183.09 ccw(c6584.03,1205.24) 6615.35,1205.24 ; 6606.18,1197.02 cw(c6584.03,1174.87) 6615.35,1174.87 ; 6606.18,1212.22 ccw(c6584.03,1234.37) 6615.35,1234.37 ; 6606.18,1212.37 cw(c6584.03,1190.22) 6615.35,1190.22 ; 6606.18,1227.57 ccw(c6584.03,1249.72) 6615.35,1249.72 ; 6606.18,1336.39 cw(c6584.03,1314.24) 6615.35,1314.24 ; 6606.18,1348.99 cw(c6584.03,1326.84) 6615.35,1326.84 ; 6606.18,1351.59 ccw(c6584.03,1373.74) 6615.35,1373.74 ; 6606.18,1378.12 cw(c6584.03,1355.97) 6615.35,1355.97 ; 6608.44,1365.92 ccw(c6601.6,1377.85) 6615.35,1377.85 ; 6615.35,1032.57 ccw(c6647.48,1032.57) 6624.76,1009.86 ; 6615.35,1056.71 ccw(c6671.62,1056.71) 6631.83,1016.93 ; 6615.35,1119.65 cw(c6673.94,1119.65) 6632.52,1161.08 ; 6615.35,1140.74 cw(c6635.93,1140.74) 6621.38,1155.29 ; 6615.35,1143.79 cw(c6649.8,1143.79) 6625.44,1168.15 ; 6615.35,1153.34 cw(c6635.93,1153.34) 6621.38,1167.89 ; 6615.35,1182.47 cw(c6635.93,1182.47) 6621.38,1197.02 ; 6615.35,1185.03 ccw(c6635.93,1185.03) 6621.38,1170.49 ; 6615.35,1197.63 ccw(c6635.93,1197.63) 6621.38,1183.09 ; 6615.35,1197.83 cw(c6635.93,1197.83) 6621.38,1212.37 ; 6615.35,1226.77 ccw(c6635.93,1226.77) 6621.38,1212.22 ; 6615.35,1239.46 ccw(c6649.8,1239.46) 6625.44,1215.1 ; 6615.35,1242.12 ccw(c6635.93,1242.12) 6621.38,1227.57 ; 6615.35,1263.6 ccw(c6673.94,1263.6) 6632.52,1222.17 ; 6615.35,1294.85 cw(c6673.94,1294.85) 6632.52,1336.28 ; 6615.35,1318.99 cw(c6649.8,1318.99) 6625.44,1343.35 ; 6615.35,1321.84 cw(c6635.93,1321.84) 6621.38,1336.39 ; 6615.35,1334.44 cw(c6635.93,1334.44) 6621.38,1348.99 ; 6615.35,1363.58 cw(c6635.93,1363.58) 6621.38,1378.12 ; 6615.35,1366.14 ccw(c6635.93,1366.14) 6621.38,1351.59 ; 6615.75,173.12 6623.62,165.25 ; 6621.15,1364.41 cw(c6633.83,1377.85) 6615.35,1377.85 ; 6623.23,972.34 6615.35,980.21 6615.35,1377.85 ; 6693.47,1222.17 ccw(c6659.45,1256.19) 6707.56,1256.19 ; 6693.47,1338.25 cw(c6659.45,1304.23) 6707.56,1304.23 ; 6694.26,416.66 ccw(c6661.19,449.73) 6707.95,449.73 ; 6694.26,532.73 cw(c6661.19,499.67) 6707.95,499.67 ; 6707.56,1193.2 cw(c6727.79,1193.2) 6717.61,1210.69 ; 6707.56,1212.65 ccw(c6749.37,1212.65) 6719.8,1183.09 ; 6707.56,1241.78 ccw(c6749.37,1241.78) 6719.8,1212.22 ; 6707.56,1254.48 ccw(c6763.25,1254.48) 6723.87,1215.1 ; 6707.56,1257.14 ccw(c6749.37,1257.14) 6719.8,1227.57 ; 6707.56,1278.62 ccw(c6787.39,1278.62) 6730.94,1222.17 ; 6707.56,1281.8 cw(c6787.39,1281.8) 6730.94,1338.25 ; 6707.56,1302.89 cw(c6749.37,1302.89) 6719.8,1332.45 ; 6707.56,1305.94 cw(c6763.25,1305.94) 6723.87,1345.32 ; 6707.56,1315.49 cw(c6749.37,1315.49) 6719.8,1345.05 ; 6707.56,1344.62 cw(c6749.37,1344.62) 6719.8,1374.19 ; 6707.56,1359.98 cw(c6749.37,1359.98) 6719.8,1389.54 ; 6707.56,1377.22 ccw(c6749.37,1377.22) 6719.8,1347.65 ; 6707.95,408.09 ccw(c6751.11,408.09) 6720.59,377.57 ; 6707.95,437.22 ccw(c6751.11,437.22) 6720.59,406.71 ; 6707.95,449.92 ccw(c6764.98,449.92) 6724.66,409.59 ; 6707.95,452.58 ccw(c6751.11,452.58) 6720.59,422.06 ; 6707.95,474.06 ccw(c6789.13,474.06) 6731.73,416.66 ; 6707.95,475.34 cw(c6789.13,475.34) 6731.73,532.74 ; 6707.95,496.43 cw(c6751.11,496.43) 6720.59,526.94 ; 6707.95,499.48 cw(c6764.98,499.48) 6724.66,539.81 ; 6707.95,509.03 cw(c6751.11,509.03) 6720.59,539.54 ; 6707.95,538.16 cw(c6751.11,538.16) 6720.59,568.67 ; 6707.95,553.51 cw(c6751.11,553.51) 6720.59,584.03 ; 6707.95,572.66 ccw(c6751.11,572.66) 6720.59,542.14 ; 6708.74,1282.18 6787.48,1282.18 ; 6713.23,380.72 cw(c6713.35,386.12) 6707.95,386.12 ; 6713.71,1186.13 cw(c6714.7,1193.2) 6707.56,1193.2 6707.56,1383.36 ccw(c6735.14,1383.36) 6718.64,1361.26 ; 6718.65,405.32 ccw(c6730.54,386.12) 6707.95,386.12 ; 6718.86,556.14 cw(c6731.98,576.27) 6707.95,576.27 6707.95,386.12 ; 6723.41,1282.18 cw(c6723.41,1195.74) 6784.53,1256.86 ; 6724.36,1282.18 cw(c6724.36,1212.84) 6773.39,1261.87 ; 6731.96,1282.18 ccw(c6731.96,1340.77) 6773.39,1299.34 ; 6738.61,1282.18 ccw(c6738.61,1347.11) 6784.53,1301.2 ; 6747.55,1282.18 cw(c6747.55,1219.89) 6791.6,1263.93 ; 6748.5,1282.18 cw(c6748.5,1236.98) 6780.46,1268.94 ; 6756.1,1282.18 ccw(c6756.1,1316.63) 6780.46,1292.27 ; 6762.76,1282.18 ccw(c6762.76,1322.97) 6791.6,1294.13 ; 6771.69,1282.18 cw(c6771.69,1244.03) 6798.67,1271 ; 6433.15,1040.37 6433.15,1281.79 ; 6433.54,233.28 6433.54,474.7
  BottomLayer w11.81: 6598.03,575.09 6598.03,622.34 ; 6598.03,584.61 ccw(c6616.7,584.61) 6608.55,567.81 ; 6598.03,598.36 ccw(c6614.61,598.36) 6614.36,581.79 ; 6598.03,603.47 ccw(c6625.86,603.47) 6613.71,578.44 ; 6598.03,610.35 ccw(c6614.79,610.35) 6614.54,593.6 ; 6606.5,609.22 ccw(c6596.25,640.05) 6628.74,640.05 ; 6607.61,587.17 ccw(c6556.59,638.19) 6628.74,638.19 ; 6609.17,603.79 ccw(c6585.37,640.05) 6628.74,640.05 ; 6610.22,598.01 ccw(c6601.69,623.68) 6628.74,623.68 ; 6614.71,605.41 cw(c6614.96,622.34) 6598.03,622.34 ; 6615.65,593.92 ccw(c6599.73,618.17) 6628.74,618.17 ; 6615.96,578.82 ccw(c6585.1,609.68) 6628.74,609.68 ; 6618.86,589.07 cw(c6635.01,622.34) 6598.03,622.34 ; 6626.31,650.61 6598.03,622.34 ; 6628.74,595.96 6628.74,640.05 ; 6644.49,655.8 6628.74,640.05 ; 6686.22,655.8 cw(c6655.71,518.6) 6792.91,488.09
  BottomLayer w19.68: 6599.26,600.25 ccw(c6562.29,637.21) 6614.57,637.21 ccw(c6666.84,637.21) 6629.88,600.25 ; 6614.57,567.22 6614.57,638.87 6631.5,655.8 6686.22,655.8 ; 6777.6,502.22 ccw(c6740.64,539.18) 6792.91,539.18 ccw(c6845.19,539.18) 6808.22,502.22 ; 6778.74,484.15 6778.74,531.79 ; 6786.12,507.46 ccw(c6777.43,533.75) 6805.12,533.75 cw(c6776.6,533.75) 6790.11,508.64 ; 6788.74,492.26 ccw(c6749.19,531.81) 6805.12,531.81 ; 6792.54,497.55 cw(c6791.69,484.15) 6805.12,484.15 6805.12,533.75 ; 6792.91,488.08 6792.91,545.96 6778.74,531.79 ; 6794.87,509.01 cw(c6802.88,531.78) 6778.74,531.78 ; 6796.76,492.57 cw(c6830.42,531.78) 6778.74,531.78 ; 6797.71,508.02 cw(c6803.11,531.78) 6778.74,531.78
  BottomLayer w39.37: 6438.19,1281.79 6438.19,1035.33 ; 6438.58,474.7 6438.58,228.24 ; 6497.24,976.27 6438.19,1035.33 ; 6497.64,169.19 6438.58,228.24 ; 6508.43,1011.04 cw(c6498.28,1095.42) 6438.19,1035.33 ; 6508.83,203.96 cw(c6498.68,288.33) 6438.59,228.24
  BottomLayer w62.99: 6438.19,1294.78 6438.19,1023.52 ; 6438.58,487.69 6438.58,216.43 ; 6461.42,1046.75 6510.32,997.85 6510.32,981.63 ; 6461.81,239.66 6510.71,190.76 6510.71,174.54 ; 6493.7,968.01 6438.19,1023.52 ; 6494.09,160.92 6438.58,216.43 ; 6509.79,999.31 cw(c6498.46,1083.78) 6438.19,1023.52 ; 6510.19,192.22 cw(c6498.85,276.69) 6438.59,216.43 ; 6614.17,981.39 6614.17,1374.31 ; 6614.57,174.31 6614.57,399.11 ; 6712.6,969.58 6712.6,1193.2 6712.6,1383.36 ; 6712.99,162.49 6712.99,386.12 6712.99,576.27
  BottomLayer w78.74: 6721.65,1282.18 6792.52,1282.18

## Other copper
TopLayer:
  region net L: 11262.19,4738.22 11278.18,4754.2 11278.18,4919.35 11251.54,4945.99 6099.88,4945.99 6015.31,5030.57 5770.77,5030.57 5740.2,4999.99 5740.2,4883.48 5807.54,4816.14 6052.6,4816.14 6119.86,4748.88
BottomLayer:
  region net L: 11262.19,4738.22 11278.18,4754.2 11278.18,4919.35 11251.54,4945.99 6099.88,4945.99 6015.31,5030.57 5770.77,5030.57 5740.2,4999.99 5740.2,4883.48 5807.54,4816.14 6052.6,4816.14 6119.86,4748.88

## Silkscreen, mask and mechanical layers (free items; w line width, h text height)
TopOverlay:
  drawing of 5689 lines, arcs and shapes, not listed
  text "应急" at 3788.78,6540.35 h118.11 r270
  text "正常" at 4080.12,6522.64 h118.11 r270
  text "PC6" at 4294.68,6464.57 h118.11
  text "AC1" at 11637.56,6454.96 h118.11
  text "AC2" at 11837.36,6452.99 h118.11
  text "加热锁定" at 4190.35,6364.17 h118.11
  text "24V" at 11299.32,6353.21 h118.11
  text "PB7" at 10408.5,6349.33 h118.11
  text "预热锁定" at 3881.49,6333.2 h118.11 r270
  text "风机锁定" at 4707.5,6333.76 h118.11 r270
  text "交流" at 11289.32,6273.21 h118.11
  text "SW1" at 3760.96,6246.52 h118.11 r270
  text "PB6" at 11298.5,6159.33 h118.11
  text "CL-HC-V1.5-B" at 6886.63,5975.42 h200
  text "应急" at 3562.43,5940.62 h118.11
  text "应急指示灯" at 2866.77,5914.48 h118.11
  text "CL-HC-C-V2.0" at -138.89,5897.17 h200
  text "PC7" at 2400.07,5880.93 h118.11
  text "开关" at 3563.67,5847.51 h118.11
  text "(220V)" at 5757.54,5370 h118.11
  text "火线" at 5698.9,5272.28 h118.11
  text "PB5" at 11811.02,4343.06 h118.11
  text "零线" at 5738.9,4272.28 h118.11
  text "PC2" at 1528.9,4216.86 h118.11
  text "PC1" at 1083.1,4189.5 h118.11
  text "PC4" at 3450.88,4181.5 h118.11
  text "PB1" at 5746.05,4154.8 h118.11
  text "PB4" at 9326.15,4081.8 h118.11 r90
  text "PB3" at 7840.57,4072.18 h118.11 r90
  text "PB2" at 6172.3,4069.78 h118.11 r90
  text "(220V)" at 3383.18,3940.63 h118.11
  text "星接法" at 4140.12,3920.93 h118.11 r270
  text "(220V)" at 1312.84,3916.02 h118.11
  text "散热扇" at 4555.12,3915.93 h118.11 r270
  text "零线" at 285.12,3900.93 h118.11 r270
  text "(220V)" at 5234.73,3896.87 h118.11
  text "零线" at 1820.12,3895.93 h118.11 r270
  text "变频" at 3730.12,3875.93 h118.11 r270
  text "定频" at 3935.12,3875.93 h118.11 r270
  text "电预热" at 1036.81,3873.03 h118.11 r270
  text "电加热" at 1662.8,3871.06 h118.11 r270
  text "三角" at 4350.12,3870.93 h118.11 r270
  text "2#" at 685.12,3865.93 h118.11 r270
  text "3#" at 885.12,3865.93 h118.11 r270
  text "1#" at 485.12,3860.93 h118.11 r270
  text "2#" at 2220.12,3860.93 h118.11 r270
  text "3#" at 2420.12,3860.93 h118.11 r270
  text "1#" at 2020.12,3855.93 h118.11 r270
  text "PC5" at 4672.7,3835.34 h118.11
  text "(220V)" at -142.14,3828.5 h118.11
  text "PC3" at 2617.4,3806.62 h118.11
  text "1#" at 6349.83,3764.79 h118.11 r90
  text "5#" at 8419.83,3764.73 h118.11 r90
  text "2#" at 6749.83,3763.99 h118.11 r90
  text "3#" at 7149.83,3763.99 h118.11 r90
  text "6#" at 8819.83,3763.47 h118.11 r90
  text "4#" at 8019.83,3761.28 h118.11 r90
  text "零线" at 11682.02,3741.92 h118.11 r90
  text "负压" at 10299.83,3726.8 h118.11 r90
  text "零线" at 6549.83,3725.88 h118.11 r90
  text "零线" at 6949.83,3725.88 h118.11 r90
  text "零线" at 7349.83,3725.88 h118.11 r90
  text "零线" at 8219.83,3725.88 h118.11 r90
  text "零线" at 8619.83,3725.88 h118.11 r90
  text "零线" at 9019.83,3725.88 h118.11 r90
  text "停保" at 9499.83,3726.05 h118.11 r90
  text "零线" at 9699.83,3725.88 h118.11 r90
  text "零线" at 10099.83,3725.88 h118.11 r90
  text "零线" at 10499.83,3725.88 h118.11 r90
  text "零线" at 10899.83,3725.88 h118.11 r90
  text "定量关" at 12030.47,3702.28 h118.11 r90
  text "密闭关" at 11282.02,3697.76 h118.11 r90
  text "密闭开" at 11482.02,3697.82 h118.11 r90
  text "定量开" at 11902.8,3697.28 h118.11 r90
  text "电柜扇" at 10699.83,3684.6 h118.11 r90
  text "杀菌灯" at 9899.83,3682.99 h118.11 r90
  text "AC24V" at 12155.47,3682.28 h118.11 r90
  text "零线" at 2919.77,3669.82 h118.11 r90
  text "零线" at 3114.3,3659.97 h118.11 r90
  text "零线" at 4926.5,3659.97 h118.11 r90
  text "零线" at 5126.5,3659.97 h118.11 r90
  text "排风机" at 6713.94,3604.25 h118.11
  text "排风机" at 8425.85,3572.42 h118.11
  text "AC24V" at 11853.94,3534.25 h118.11
  text "(220V)" at 7924.42,3528.74 h118.11
  text "(220V)" at 9411.07,3528.74 h118.11
  text "(220V)" at 11077.52,3524.25 h118.11
  text "(220V)" at 6229.83,3508.74 h118.11
  text "浮点阀硬接线扩展板" at 2650,3240 h118.11
  text "CL-FG-V1.0" at 2630,3050 h200
  text "PF1" at 4770,3040 h118.11
  text "公共" at 3755.58,3014.86 h118.11 r270
  text "F1" at 3945.85,3014.85 h118.11 r270
  text "R1" at 4147.91,3014.86 h118.11 r270
  text "F2" at 4349.98,3014.85 h118.11 r270
  text "R2" at 4552.04,3014.86 h118.11 r270
  text "si1" at 6400.79,1460.53 h39.37
  text "Ji8" at 6484.25,1003.44 h60 r90
  text "si2" at 6391.34,631.79 h39.37
  text "Ji9" at 6484.25,203.44 h60 r90
BottomOverlay:
  text "B01-06" at 6520.87,1497.14 h48.19 r180
  text "-" at 6722.05,1263.28 h39.37 r270
  text "+" at 6474.8,1262.49 h39.37 r270
  text "C" at 6692.91,1062.49 h39.37 r270
  text "ON" at 6589.37,1053.05 h39.37 r270
  text "GND" at 6768.9,947.53 h39.37 r270
  text "PWE-LED" at 6414.57,912.89 h39.37 r270
  text "JI11" at 6648.82,895.96 h39.37
  text "B01-07" at 6483.07,671.94 h48.19 r180
  text "-" at 6724.02,457.77 h39.37 r270
  text "+" at 6476.77,456.2 h39.37 r270
  text "C" at 6694.09,246.75 h39.37 r270
  text "ON" at 6593.31,240.05 h39.37 r270
  text "GO" at 6769.29,140.45 h39.37 r270
  text "5V" at 6391.73,102.26 h39.37 r270
  text "JI10" at 6653.94,82.57 h39.37
BottomSolder:
  lines w25: -10.67,4770.44 -10.67,4793.35 1343.53,4793.35 ; 299.61,3982.32 299.61,3877.06 503.4,3673.27 5086.65,3673.27 5086.65,4106.99 ; 300.09,4083.74 300.09,3951.96 403.58,3848.46 5075.24,3848.46 ; 415.5,3761.85 5074.21,3761.85 ; 673.02,4801.56 675.82,4804.36 675.82,5126.8 818.84,5269.82 3594.75,5269.82 3611.56,5286.63 3810.65,5485.73 3810.65,6055.34 3898.03,6142.72 4139.17,6142.72 ; 1566.95,4770.44 2918.7,4770.44 ; 1841.93,3674.25 1841.93,4105.93 ; 2743.35,4775.96 2743.35,5073.87 2796.31,5126.82 3658.88,5126.82 3835.53,5303.47 4319.63,5303.47 4361.53,5345.37 4361.53,6109.09 4333.09,6137.53 ; 2874.45,3676.22 2874.45,4106.99 ; 3074.45,3676.22 3074.45,4106.99 ; 3184.15,4764.8 3731.22,4764.8 ; 3662.01,4761.77 3949.81,4761.77 ; 3802.08,4762.83 3802.08,5000.55 3940.35,5138.82 4874.92,5138.82 ; 4535.83,6143.7 4763.6,6143.7 4874.92,6032.38 4874.92,5198.82 ; 4722.2,4770.44 5546.7,4770.44 ; 4874.92,4774.25 4874.92,5324.25 ; 4886.65,3676.22 4886.65,4106.99 ; 5812.09,4450.05 5868.5,4351.63 ; 5860.69,4909.06 6038.58,4909.06 ; 5870.31,4121.89 5870.31,4377.8 ; 5870.31,4514.83 5870.31,4101.37 6192.42,3779.25 6264.16,3707.52 11600.08,3707.52 ; 5892.15,4565.42 5976.08,4452.33 5976.08,4154.25 6315.53,3814.8 11600.08,3814.8 ; 6066.22,4905.46 11212.86,4905.46 ; 6067,4880.64 5813.89,4889.61 5932,4948.66 6038.58,4909.06 ; 6171.15,4602.53 6473.94,4602.53 6481.79,4594.68 6481.79,4460.36 6293.01,4271.58 6293.01,4122.73 ; 6211.12,3932.53 11600.08,3932.53 ; 6699.43,4146.34 6699.43,4351.63 6668.75,4382.31 6668.75,4574.42 6696.86,4602.53 6986.41,4602.53 ; 6899.43,3699.33 6899.43,4146.34 ; 7099.43,4146.34 7099.43,4293.84 7210.18,4404.59 7210.18,4583.79 7228.92,4602.53 7501.91,4602.53 ; 7299.43,3699.33 7299.43,4146.34 ; 7748.28,4602.53 8042.24,4602.53 ; 7969.43,4146.34 7969.43,4405.9 7988.38,4424.85 7988.38,4587.42 ; 8169.43,3699.33 8169.43,4146.34 ; 8369.43,4169.93 8369.43,4258.81 8271.54,4356.69 8271.54,4600.08 8274,4602.53 8554.71,4602.53 ; 8569.43,3699.33 8569.43,4146.34 ; 8754.38,4137.26 8754.38,4251.66 8799.71,4296.99 8799.71,4587.42 8803.34,4591.05 9081.11,4591.05 ; 8969.43,3699.33 8969.43,4146.34 ; 9462.29,4162.67 9462.29,4169.2 9328.25,4303.25 9328.25,4572.9 9357.88,4602.53 9618.4,4602.53 ; 9649.43,3699.33 9649.43,4166.34 ; 9849.43,4166.34 9849.43,4614.14 9861.04,4602.53 10141.17,4602.53 ; 10049.43,3699.33 10049.43,4166.34 ; 10257.34,4151.78 10257.34,4311.51 10398.92,4453.1 10398.92,4573.24 10428.21,4602.53 10645.78,4602.53 ; 10449.43,3699.33 10449.43,4166.34 ; 10649.43,4173.56 10649.43,4230.28 10896.28,4477.13 10896.28,4584.99 10909.59,4598.31 11188.61,4598.31 11197.59,4607.29 ; 10849.43,3699.33 10849.43,4166.34 ; 11221.27,4784.06 6163.58,4784.06 6038.58,4909.06 ; 11600.08,3686.96 11600.08,4153.96
Mechanical1:
  circle w10: c5417.72,3641.73 r66.93
  circle w10: c5496.46,6318.9 r66.93
  circle w10: c63.39,6318.9 r66.93
  circle w10: c63.39,3641.73 r66.93
  circle w10: c12313.39,6316.93 r66.93
  circle w10: c12313.39,3639.76 r66.93
  circle w10: c7635.26,4164.8 r66.93
  circle w10: c5817.32,3639.76 r66.93
  circle w10: c5817.32,6316.93 r66.93
  circle w10: c2413.15,2874.06 r66.93
  circle w10: c5956.46,2874.06 r66.93
  circle w10: c2413.15,1732.32 r66.93
  circle w10: c5956.46,1732.32 r66.93
  circle w10: c5956.46,-157.44 r66.93
  circle w10: c2413.15,-157.44 r66.93
  circle w10: c5956.46,984.29 r66.93
  circle w10: c2413.15,984.29 r66.93
  lines w10: -172.83,3622.05 ccw(c-35.04,3622.05) -35.04,3484.25 ; -172.83,6417.32 cw(c-35.04,6417.32) -35.04,6555.12 ; 2295.04,-255.86 ccw(c2432.84,-255.86) 2432.84,-393.66 ; 2295.04,1358.31 cw(c2432.84,1358.31) 2432.84,1496.1 ; 2295.04,1633.9 ccw(c2432.84,1633.9) 2432.84,1496.1 ; 2295.04,3248.07 cw(c2432.84,3248.07) 2432.84,3385.87 ; 5516.14,3484.25 ccw(c5516.14,3622.05) 5653.94,3622.05 ccw(c5791.73,3622.05) 5791.73,3484.25 ; 5516.14,6555.12 cw(c5516.14,6417.32) 5653.94,6417.32 cw(c5791.73,6417.32) 5791.73,6555.12 ; 5936.78,-393.66 ccw(c5936.78,-255.86) 6074.57,-255.86 ; 5936.78,1496.1 cw(c5936.78,1358.31) 6074.57,1358.31 ; 5936.78,1496.1 ccw(c5936.78,1633.9) 6074.57,1633.9 ; 5936.78,3385.87 cw(c5936.78,3248.07) 6074.57,3248.07 ; 6377.95,707.38 6835.43,707.38 ; 6377.95,3412.49 6836.22,3412.49 ; 12287.8,3484.25 ccw(c12287.8,3622.05) 12425.59,3622.05 ; 12287.8,6555.12 cw(c12287.8,6417.32) 12425.59,6417.32 ; 2295.04,1496.1 2295.04,3385.87 6074.57,3385.87 6074.57,1496.1 ; 2295.04,1496.1 6074.57,1496.1 ; 2295.04,1496.1 2295.04,-393.66 6074.57,-393.66 6074.57,1496.1 ; 2295.04,1496.1 6074.57,1496.1 ; 5653.94,3484.25 5653.94,6555.12 ; 5653.94,3484.25 -172.83,3484.25 -172.83,6555.12 5653.94,6555.12 ; 5653.94,3484.25 5653.94,6555.12 ; 5653.94,3484.25 12425.59,3484.25 12425.59,6555.12 5653.94,6555.12 ; 6377.95,-118.21 6836.22,-118.21 6836.22,1522.73 6377.95,1522.73 6377.95,-118.21
  text "PCB名称: CL-HC-C-V2.0" at -47.54,7910.72 h120
  text "PCB名称: CL-HC-V1.5-B" at 5818.6,7910.72 h120
  text "尺寸： 14.8CM*7.8CM" at -47.42,7772.81 h120
  text "尺寸： 17.2CM*7.8CM" at 5818.72,7772.81 h120
  text "板材：  FR4" at -47.42,7633.88 h120
  text "板材：  FR4" at 5818.72,7633.88 h120
  text "板子层数：  2" at -47.42,7495.75 h120
  text "板子层数：  2" at 5818.72,7495.75 h120
  text "板子厚度：  1.6" at -47.42,7356.58 h120
  text "板子厚度：  1.6" at 5818.72,7356.58 h120
  text "阻焊颜色：  蓝色" at -47.54,7218.34 h120
  text "阻焊颜色：  蓝色" at 5818.6,7218.34 h120
  text "铜箔厚度：  h/hoz" at -47.54,7079.17 h120
  text "铜箔厚度：  h/hoz" at 5818.6,7079.17 h120
  text "阻焊覆盖：  过孔盖油" at -47.54,6940.35 h120
  text "阻焊覆盖：  过孔盖油" at 5818.6,6940.35 h120
  text "字符颜色：  白色" at -47.42,6802.22 h120
  text "字符颜色：  白色" at 5818.72,6802.22 h120
  text "焊盘喷镀：  有铅喷锡" at -47.42,6663.17 h120
  text "焊盘喷镀：  有铅喷锡" at 5818.72,6663.17 h120
  text "PCB名称: CL-HC-A-V2.0" at 1069.16,3028.87 h120
  text "尺寸： 9.6CM*9.6CM" at 1069.28,2890.96 h120
  text "板材：  FR4" at 1069.28,2752.03 h120
  text "板子层数：  2" at 1069.28,2613.9 h120
  text "板子厚度：  1.6" at 1069.28,2474.73 h120
  text "阻焊颜色：  蓝色" at 1069.16,2336.49 h120
  text "铜箔厚度：  h/hoz" at 1069.16,2197.32 h120
  text "阻焊覆盖：  过孔盖油" at 1069.16,2058.51 h120
  text "字符颜色：  白色" at 1069.28,1920.37 h120
  text "焊盘喷镀：  有铅喷锡" at 1069.28,1781.32 h120
DrillDrawing:
  text ".legend" at 12807.8,748.62 h80

## Text inside footprints (layer, text, board x,y; h text height)
LX1: TopOverlay "+" at 2958.64,6036.55 h60 r270
SW1: TopOverlay "NC" at 6568.5,1090.05 h39.37 r90; TopOverlay "ON" at 6650.39,1083.36 h39.37 r90; TopOverlay "C" at 6747.64,1110.92 h39.37 r90; TopOverlay "NC" at 6563.39,1408.56 h39.37 r90; TopOverlay "ON" at 6662.2,1415.25 h39.37 r90; TopOverlay "C" at 6762.6,1408.95 h39.37 r90
SW2: TopOverlay "NC" at 6569.29,284.54 h39.37 r90; TopOverlay "ON" at 6651.18,277.85 h39.37 r90; TopOverlay "C" at 6748.43,305.41 h39.37 r90; TopOverlay "NC" at 6564.17,603.05 h39.37 r90; TopOverlay "ON" at 6662.99,609.74 h39.37 r90; TopOverlay "C" at 6763.39,603.44 h39.37 r90
UB1: TopOverlay "~" at 2840,6180 h60; TopOverlay "+" at 2751.49,6290.11 h60; TopOverlay "-" at 2931.56,6289.63 h60; TopOverlay "~" at 2840,6340 h60